# EAGLE board Module-WiFi-M0-v0.2 (EAGLE 7.5.0)

Size 81 x 60 mm. Coordinates in mm from the lower left corner, seen from the top.
Outline: 0,2 8,2 8,0 16,0 16,2 24,2 24,13.73 20.8,13.73 20.8,16.48 24,16.48 24,52.25 20.5,52.25 20.5,55.75 3.5,55.75 3.5,52.25 0,52.25 0,16.48 3.2,16.48 3.2,13.73 0,13.73 0,2
Outline: 60,60 60,57 57,57 57,0 78,0 78,3 81,3 81,60 60,60
Outline: 64.5,42.75 64.5,41 73.5,41 73.5,42.75 64.5,42.75
Copper layers (1*16): Top 0.035mm / dielectric 1.5mm / Bottom 0.035mm
Design rules "default": minimum track width 10mil, minimum drill 24mil, track to track 8mil, track to pad 8mil, pad to pad 8mil, via to via 8mil, smd to smd 8mil, copper to edge 40mil, drill to drill 8mil, minimum pad ring 10mil, minimum via ring 8mil, stop-mask expansion 4mil, vias tented up to drill 0mil, thermal gap 10mil
Holes 3 mm at 60.5,3
Holes 0.01 mm at 0,0 12,18 57,0
Holes 0.5 mm at 10.72,4.5

## Footprints (pad centres in the part's own frame; a part is rotated, then mirrored left to right if it is on the bottom)
CAP-SLEEP = drill 0.813 pad 1.575: + -1.27,0 | drill 0.813 pad 1.575 octagon: - 1.27,0
0402-CAP = smd 0.85 x 0.9: 1 -0.58,0; 2 0.58,0
1206 = smd 1.6 x 1.8: 1 -1.4,0; 2 1.4,0
SOD523 = smd 0.7 x 0.5: A 0.7,0; C -0.6,0
SOD-923 = smd 0.36 x 0.25: A -0.6,0; C 0.6,0
LED_RGB = smd 1.2 x 0.9: 1-RED 1.4,-0.725; 2-CA -1.4,-0.725; 3-BL -1.4,0.725; 4-GR 1.4,0.725
FIDUCIAL-1X2 = smd 1 x 1: 1 0,0
SOT223 = smd 1.219 x 2.235: 1 -2.311,-3.099; 2 0,-3.099; 3 2.311,-3.099 | smd 3.6 x 2.2: 4 0,3.099
SOIC-8-TIGHT = smd 0.6 x 1.2: 1 -1.905,-2.8; 2 -0.635,-2.8; 3 0.635,-2.8; 4 1.905,-2.8; 5 1.905,2.8; 6 0.635,2.8; 7 -0.635,2.8; 8 -1.905,2.8
WT8266 = smd 1.5 x 1: 1 -7.75,1.35; 2 -7.75,-0.15; 3 -7.75,-1.65; 4 -7.75,-3.15; 5 -7.75,-4.65; 6 -7.75,-6.15; 13 7.75,-6.15; 14 7.75,-4.65; 15 7.75,-3.15; 16 7.75,-1.65; 17 7.75,-0.15; 18 7.75,1.35 | smd 1 x 1.5: 7 -3.6,-9.75; 8 -2.1,-9.75; 9 -0.6,-9.75; 10 0.9,-9.75; 11 2.4,-9.75; 12 3.9,-9.75
DSS12_P9X2 = smd 0.5 x 0.28: 1 -0.959,1.25; 2 -0.959,0.75; 3 -0.959,0.25; 4 -0.959,-0.25; 5 -0.959,-0.75; 6 -0.959,-1.25; 7 0.959,-1.25; 8 0.959,-0.75; 9 0.959,-0.25; 10 0.959,0.25; 11 0.959,0.75; 12 0.959,1.25 | smd 0.9 x 2.3: 13 0,0 | smd 0.305 x 0.61: 13@1 -0.25,1.36; 13@2 0.25,1.36; 13@3 -0.25,-1.36; 13@4 0.25,-1.37 | drill 0.254 pad 0.508: G1 0,0.406; G2 0,-0.406
DHVQFN16 = smd 0.24 x 0.9: 1 -0.25,1.8; 8 -0.25,-1.8; 9 0.25,-1.8; 16 0.25,1.8 | smd 0.9 x 0.24: 2 -1.3,1.25; 3 -1.3,0.75; 4 -1.3,0.25; 5 -1.3,-0.25; 6 -1.3,-0.75; 7 -1.3,-1.25; 10 1.3,-1.25; 11 1.3,-0.75; 12 1.3,-0.25; 13 1.3,0.25; 14 1.3,0.75; 15 1.3,1.25 | smd 0.9 x 1.9: EPAD 0,0
DFN-8 = smd 0.3 x 0.75: 1 -0.75,-1.025; 2 -0.25,-1.025; 3 0.25,-1.025; 4 0.75,-1.025; 5 0.75,1.025; 6 0.25,1.025; 7 -0.25,1.025; 8 -0.75,1.025 | smd 1.6 x 0.45: PAD 0,0
CONN-MAG = smd 1.5 x 2.6 bottom: GND@1 -2.475,0; GND@4 2.475,0 | smd 1.5 x 2.6: GND@2 2.475,0; GND@3 -2.475,0 | drill 0.8 pad 1.5: POS 0,0
MOTOR-NO_HOLE = smd 0.1 x 0.1: M1 5.3,1.4; M2 -5.3,1.5
2,15/1,0 = drill 1.016 pad 2.159 octagon: 1 0,0
SOT23-6 = smd 0.6 x 0.9: 1 -0.95,-1.15; 2 0,-1.15; 3 0.95,-1.15; 4 0.95,1.15; 5 0,1.15; 6 -0.95,1.15
SOT-23 = smd 1.016 x 1.143: 1 -0.889,-1.016; 2 0.889,-1.016; 3 0,1.016
R0402 = smd 0.7 x 0.9: 1 -0.65,0; 2 0.65,0
R1206 = smd 1.6 x 1.803: 1 -1.422,0; 2 1.422,0
0603-ARV = smd 0.5 x 0.65: 1 -1.2,-0.625; 2 -0.4,-0.625; 3 0.4,-0.625; 4 1.2,-0.625; 5 1.2,0.625; 6 0.4,0.625; 7 -0.4,0.625; 8 -1.2,0.625
ANGLE_SENSOR_MURATA = smd 1.8 x 2: 1 -2.5,-7.7; 2@1 0,-7.7; 2@2 0,6.2; 3 2.5,-7.7 | hole 5.1: 0,0 | hole 1.2: -4.24,-5.51; 4.24,-5.53
TACTILE_SWITCH_TALL = smd 1.55 x 1.3: A1 -3.975,-2.25; A2 3.975,-2.25; B1 -3.975,2.25; B2 3.975,2.25
FE07-2W = drill 1.016 octagon: 1 -7.62,1.27; 2 -7.62,-1.27; 3 -5.08,1.27; 4 -5.08,-1.27; 5 -2.54,1.27; 6 -2.54,-1.27; 7 0,1.27; 8 0,-1.27; 9 2.54,1.27; 10 2.54,-1.27; 11 5.08,1.27; 12 5.08,-1.27; 13 7.62,1.27; 14 7.62,-1.27
FE07-2 = drill 0.914: 1 -7.62,1.27 | drill 0.914 octagon: 2 -7.62,-1.27; 3 -5.08,1.27; 4 -5.08,-1.27; 5 -2.54,1.27; 6 -2.54,-1.27; 7 0,1.27; 8 0,-1.27; 9 2.54,1.27; 10 2.54,-1.27; 11 5.08,1.27; 12 5.08,-1.27; 13 7.62,1.27; 14 7.62,-1.27

## Placement (x,y rotation side)
C1  [CAP-SLEEP]  21,27 270 bottom
C2  10uF  [0402-CAP]  3,23 90 bottom
C3  0.1uF  [0402-CAP]  71,16 270 top
C4  10uF  [0402-CAP]  61,8 180 top
C5  0.1uF  [0402-CAP]  74,16 270 top
C6  10uF  [0402-CAP]  74,19 180 top
C7  0.1uF  [0402-CAP]  17,27 0 bottom
C8  10uF  [0402-CAP]  61,10 180 top
C9  10uF  [0402-CAP]  9,31 0 bottom
C10  10uF  [0402-CAP]  14,52 0 top
C11  100u  [1206]  14,54 0 top
C12  10u  [0402-CAP]  21,32 90 bottom
C13  0.1uF  [0402-CAP]  12,29 0 top
D1  PMEG3005EB  [SOD523]  74,13 270 top
D2  PMEG3005EB  [SOD523]  3,10 90 top
D3  ESD9X5  [SOD-923]  17,31 0 bottom
D4  PMEG3005EB  [SOD523]  78,19 180 top
D5  [LED_RGB]  69,5 90 top
D6  [LED_RGB]  69,55 90 top
FD1  FIDUCIAL1X2  [FIDUCIAL-1X2]  53.47,60.39 0 top
FD2  FIDUCIAL1X2  [FIDUCIAL-1X2]  50.93,60.39 0 top
FD3  FIDUCIAL1X2  [FIDUCIAL-1X2]  48.39,60.39 0 top
FD4  FIDUCIAL1X2  [FIDUCIAL-1X2]  45.85,60.39 0 top
FD5  FIDUCIAL1X2  [FIDUCIAL-1X2]  43.31,60.39 0 top
FD6  FIDUCIAL1X2  [FIDUCIAL-1X2]  40.77,60.39 0 top
FD7  FIDUCIAL1X2  [FIDUCIAL-1X2]  38.23,60.39 0 top
FD8  FIDUCIAL1X2  [FIDUCIAL-1X2]  35.69,60.39 0 top
IC1  LM1117_3.3VSOT223  [SOT223]  10,12 270 top
IC2  BQ2057WSNTR  [SOIC-8-TIGHT]  77,38 0 top
IC3  WT8266  [WT8266]  14,42 270 top
IC4  DRV8835DSSR  [DSS12_P9X2]  12,17 90 top
IC5  74HC4051_DHVQFN16  [DHVQFN16]  5,46 0 bottom
IC6  LM358-DFN  [DFN-8]  17,22 270 bottom
J1  CONN-CIR_MAG  [CONN-MAG]  69,30 180 bottom
M1  Round Motor  [MOTOR-NO_HOLE]  12,18 0 top
N  WIREPAD2,15/1,0  [2,15/1,0]  59,13 90 top
P  WIREPAD2,15/1,0  [2,15/1,0]  64,13 90 top
Q1  IRLTS2242-PMOS  [SOT23-6]  76,22 270 top
Q2  2N7002-NMOS  [SOT-23]  65,37 90 top
Q3  IRLTS2242-PMOS  [SOT23-6]  61,39 0 top
R1  30k  [R0402]  73,38 270 top
R2  0.5E, 0.5W  [R1206]  76,28 90 top
R3  300k  [R0402]  66,16 270 top
R4  300k  [R0402]  71,13 270 top
R5  300k  [R0402]  68,13 270 top
R6  3k  [R0402]  65,9 90 top
R7  3k  [R0402]  69,38 270 top
R8  3k  [R0402]  71,38 270 top
R9  30k  [R0402]  18,31 0 top
R10  3k  [R0402]  8,53 0 top
R11  3k  [R0402]  3,33 0 top
R12  30k  [R0402]  3,33 0 bottom
R13  30k  [R0402]  71,19 270 top
R14  3k  [R0402]  68,19 90 top
R15  30k  [R0402]  13,34 0 bottom
R16  3k  [R0402]  3,29 0 bottom
R17  500E  [0603-ARV]  61,54 180 top
R18  30k  [R0402]  4,39 0 bottom
R19  30k  [R0402]  8,22 0 bottom
R20  0.02E, 1W  [R1206]  12,21 180 top
R21  10k  [ANGLE_SENSOR_MURATA]  12,45.92 0 bottom
S2  On/Off Sw  [TACTILE_SWITCH_TALL]  69,25 180 top
SV1  [FE07-2W]  12,5.8 0 top
SV2  [FE07-2]  69,48.2 180 top

## Library data of the parts
C1 D3 D5 D6 IC3 IC5 J1 M1 Q1 Q3 R21 = 1_ZeroUI
C2-C10 C12 C13 = 1_ZeroUI; PROD_ID: CAP-12416
C11 R17 = SparkFun-Passives
D1 D2 D4 = diode
FD1-FD8 = SparkFun-Aesthetics
IC1 = 1_ZeroUI; PROD_ID: VREG-08170
IC2 = 1_ZeroUI; DATASHEETURL: http://www.ti.com/lit/ds/symlink/bq2057c.pdf
IC4 = 1_ZeroUI; MANUFACTURER_PART_NUMBER: drv8835_dss_12; VENDOR: Texas Instruments
IC6 = 1_ZeroUI; VARIANT: DFN
N P = wirepad
Q2 = 1_ZeroUI; MPN: 2N7002,215
R1-R16 R18-R20 = rcl
S2 = 1_ZeroUI; PROD_ID: SWCH-11966
SV1 SV2 = con-lsta; OC_FARNELL: unknown; OC_NEWARK: unknown

## Nets
3.3V: C6.1 C7.1 C9.1 C10.1 D3.C D5.2-CA D6.2-CA IC1.2 IC1.4 IC3.1 IC3.14 IC4.12 IC5.16 IC5.EPAD IC6.8 R4.2 R10.2 R11.2 R18.1 SV1.7 SV2.8
12V: C4.1 IC2.3 IC2.8 J1.POS R2.1 R6.2 R7.1
CHG_ON: D4.A IC2.5 IC5.12 SV1.9 SV2.10
DTR: C12.2 D2.C SV1.10 SV2.9
GND: C1.- C2.2 C4.2 C7.2 C8.2 C9.2 C10.2 C11.2 C13.2 D3.A IC1.1 IC2.6 IC3.6 IC3.10 IC3.18 IC4.11 IC5.6 IC5.7 IC5.8 IC6.4 IC6.PAD J1.GND@1 J1.GND@2 J1.GND@3 J1.GND@4 N.1 Q2.2 R8.2 R12.1 R14.1 R16.1 R20.2 R21.3 S2.A2 SV1.5 SV1.6 SV2.5 SV2.6
LED-G: IC3.16 R17.7 SV1.14 SV2.13
MOT_IN1: IC3.4 IC4.8 IC4.10
MOT_IN2: IC3.17 IC4.7 IC4.9
MOT_IRAW: IC4.6 IC4.13 IC4.G1 IC4.G2 R15.2 R20.1
MOT_ISNS: IC5.14 IC6.1 R19.1
MOT_POS: IC5.13
MUX_COM: IC3.13 IC5.3
MUX_S0: IC3.8 IC5.11
MUX_S1: IC3.2 IC5.10
MUX_S2: IC3.5 IC5.9 R12.2
N$1: R21.2@1 R21.2@2
N$2: IC4.3 IC4.5 M1.M2
N$3: IC4.2 IC4.4 M1.M1
N$4: IC3.7 R9.2
N$6: D5.1-RED D6.1-RED R17.1
N$7: D5.4-GR D6.4-GR R17.2
N$8: D5.3-BL D6.3-BL R17.3
N$10: C13.1 IC6.3 R15.1
N$11: IC2.1 Q1.4 R2.2
N$12: IC2.7 Q1.3 R6.1
N$14: C3.1 D1.C R1.1 S2.B2
N$16: C3.2 C5.2 Q2.3 Q3.3 R3.1
N$17: R18.2 R21.1
N$18: IC6.2 R16.2 R19.2
PROGL/LED-B: D2.A IC3.3 R11.1 R17.6 SV1.8 SV2.7
PWR_EN: C6.2 D4.C Q2.1 R5.1 R9.1 SV1.12 SV2.11
RST: C12.1 IC3.12 R10.1
RXD/LED-R: IC3.9 R17.8 SV1.3 SV2.4
SW_INT: D1.A IC3.15 R4.1 R5.2 SV1.11 SV2.12
TS: IC2.4 R7.2 R8.1
TXD: IC3.11 SV1.4 SV2.3
V_BATT: C5.1 C8.1 C11.1 IC2.2 P.1 Q1.1 Q1.2 Q1.5 Q1.6 Q3.4 R1.2 R3.2 R13.2
VBATT_SENSE: IC5.15 R13.1 R14.2 SV1.13 SV2.14
VDD: C1.+ C2.1 IC1.3 IC4.1 Q3.1 Q3.2 Q3.5 Q3.6 SV1.1 SV1.2 SV2.1 SV2.2

## Tracks (layer width: path | path; a pad name or v marks a point on that pad's centre or on a via)
3.3V  (20 unrouted)
12V  (6 unrouted)
CHG_ON  (4 unrouted)
DTR  (3 unrouted)
GND  (37 unrouted)
LED-G  (3 unrouted)
MOT_IN1  (2 unrouted)
MOT_IN2  (2 unrouted)
MOT_IRAW  (5 unrouted)
MOT_ISNS  (2 unrouted)
MUX_COM  (1 unrouted)
MUX_S0  (1 unrouted)
MUX_S1  (1 unrouted)
MUX_S2  (2 unrouted)
N$1  (1 unrouted)
N$2  (2 unrouted)
N$3  (2 unrouted)
N$4  (1 unrouted)
N$6  (2 unrouted)
N$7  (2 unrouted)
N$8  (2 unrouted)
N$10  (2 unrouted)
N$11  (2 unrouted)
N$12  (2 unrouted)
N$14  (3 unrouted)
N$16  (4 unrouted)
N$17  (1 unrouted)
N$18  (2 unrouted)
PROGL/LED-B  (5 unrouted)
PWR_EN  (6 unrouted)
RST  (2 unrouted)
RXD/LED-R  (3 unrouted)
SW_INT  (5 unrouted)
TS  (2 unrouted)
TXD  (2 unrouted)
V_BATT  (12 unrouted)
VBATT_SENSE  (4 unrouted)
VDD  (11 unrouted)

## Text on the board
Reference: TOP PCB | BOTTOM PCB